# Altium PCB TSAL_PCB(2024).PcbDoc
Units mm, origin at the board's own origin, x right, y up, seen from the top; angles counter-clockwise.
Board outline 213 x 19 mm, 2 copper layers (Top Layer, Bottom Layer), stack 0.145 mm thick; 40 components, 25 nets, 107 pads, 27 vias.
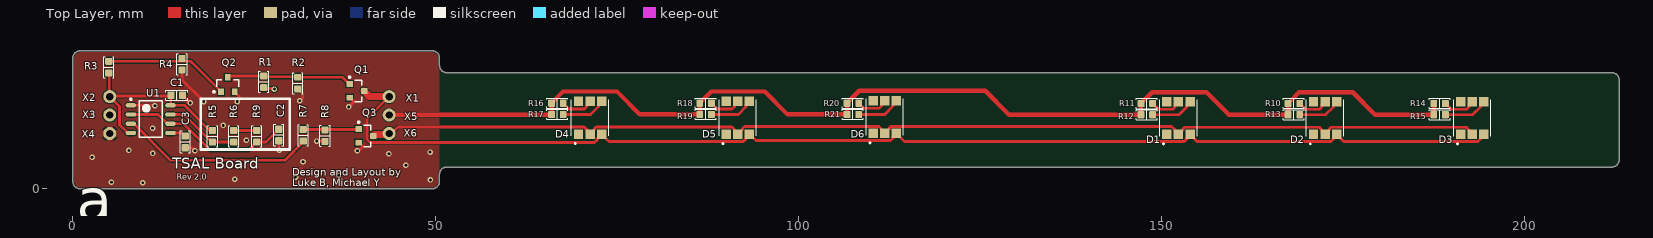
[diagram p0: Top Layer view]
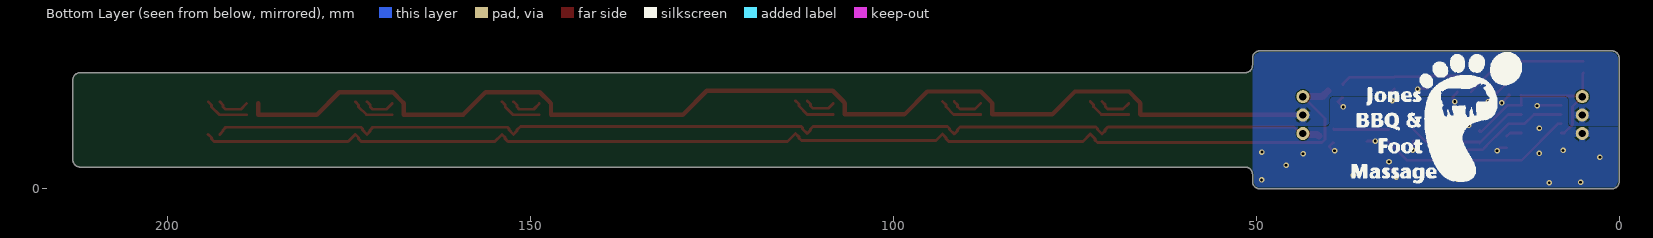
[diagram p1: Bottom Layer view, seen from below]
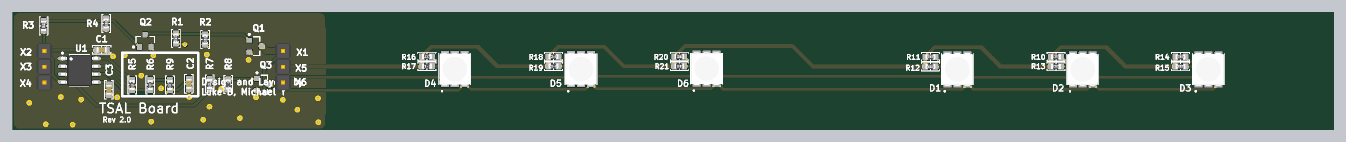
[diagram p2: 3D render of the assembled board from above, using the file's embedded part models]

## Layer stack, top to bottom
Board Layer Stack Top Coverlay: solder mask 0.0254, SM-001, Dk 4
Board Layer Stack Top Coverlay: solder mask 0.025, FC-001, Dk 4
Adhesive 1: prepreg 0.025, Core-009, Dk 4.5
Top Layer: signal copper 0.035
Dielectric 1: core 0.025, Core-009, Dk 4.5
Bottom Layer: signal copper 0.035
Adhesive 2: prepreg 0.025, Core-009, Dk 4.5
Board Layer Stack Bottom Solder: solder mask 0.025, FC-001, Dk 4
Board Layer Stack Bottom Solder: solder mask 0.0254, SM-001, Dk 4

## Board outline
0,1 0,18 cw(c1,18) 1,19 49.5,19 cw(c49.5,18) 50.5,18 50.5,17 ccw(c51.5,17) 51.5,16 212,16 cw(c212,15) 213,15 213,4 cw(c212,4) 212,3 51.5,3 ccw(c51.5,2) 50.5,2 50.5,1 cw(c49.5,1) 49.5,0 1,0 cw(c1,1)

## Design rules (kind name [scope] priority, off if disabled: settings)
BoardOutlineClearance [All] p1: gap=0.2 ignorepadtopadclearanceinfootprint=FALSE
Clearance [All] p1: gap=0.127 ignorepadtopadclearanceinfootprint=FALSE except(0.25: Arc-Hole Track-Hole SMDPad-Hole THPad-Hole Via-Hole Fill-Hole Poly-Hole Region-Hole Text-Hole)
ComponentClearance [All] p1: gap=0.127 collisioncheckmode=3 verticalgap=0.127 showdistances=TRUE
DiffPairsRouting [All] p1: maxlimit=0.254 minlimit=0.127 mostfreqgap=0.127 toplayer_minwidth=0.127 toplayer_maxwidth=25.4 toplayer_prefwidth=0.127 bottomlayer_minwidth=0.127 bottomlayer_maxwidth=25.4 bottomlayer_prefwidth=0.127 substack1={42DB8109-C194-40DB-AB75-C9E4D2E15DD2} toplayer_{42db8109-c194-40db-ab75-c9e4d2e15dd2}_minwidth=0.381 toplayer_{42db8109-c194-40db-ab75-c9e4d2e15dd2}_maxwidth=0.381 toplayer_{42db8109-c194-40db-ab75-c9e4d2e15dd2}_prefwidth=0.381 bottomlayer_{42db8109-c194-40db-ab75-c9e4d2e15dd2}_minwidth=0.381 bottomlayer_{42db8109-c194-40db-ab75-c9e4d2e15dd2}_maxwidth=0.381 bottomlayer_{42db8109-c194-40db-ab75-c9e4d2e15dd2}_prefwidth=0.381 maxuncoupledlength=12.7
Height [All] p1: minheight=0 maxheight=1816.048 prefheight=12.7
HoleSize [All] p1: absolutevalues=TRUE maxlimit=6.3 minlimit=0.3 maxpercent=80.000 minpercent=20.000
HoleToHoleClearance [All] p1: gap=0.25 allowstackedmicrovias=FALSE
MinimumAnnularRing [All] p1: minimumring=0.076
MinimumSolderMaskSliver [All] p1: minsoldermaskwidth=0
PlaneClearance [All] p1: clearance=0.127
PlaneConnect PlaneConnectPowerPads [InPadClass('PowerPads')] p1: planeconnectstyle=Direct reliefexpansion=0.508 reliefentries=4 reliefconductorwidth=0.254 reliefairgap=0.254
PlaneConnect [All] p2: pad.planeconnectstyle=Relief pad.reliefexpansion=0.3 pad.reliefentries=4 pad.reliefconductorwidth=0.127 pad.reliefairgap=0.127 via.planeconnectstyle=Direct via.reliefexpansion=0.3 via.reliefentries=4 via.reliefconductorwidth=0.127 via.reliefairgap=0.127
PolygonConnect PolygonConnectPowerPads [All vs (InPadClass('PowerPads'))] p1: connectstyle=Direct reliefconductorwidth=0.254 reliefentries=4 polygonreliefangle="90 Angle" airgapwidth=0.254
PolygonConnect [All] p2: thpad.connectstyle=Relief thpad.reliefconductorwidth=0.127 thpad.reliefentries=4 thpad.polygonreliefangle="90 Angle" thpad.airgapwidth=0.127 smdpad.connectstyle=Relief smdpad.reliefconductorwidth=0.127 smdpad.reliefentries=4 smdpad.polygonreliefangle="90 Angle" smdpad.airgapwidth=0.127 via.connectstyle=Direct via.reliefconductorwidth=0.127 via.reliefentries=4 via.polygonreliefangle="90 Angle" via.airgapwidth=0.127
RoutingVias [All] p1: holewidth=0.3 width=0.6 viastyle="Through Hole" minholewidth=0.3 minwidth=0.6 maxholewidth=0.6 maxwidth=6.6
SilkToSilkClearance [All] p1: silktosilkclearance=0
SilkToSolderMaskClearance [IsPad] p1: minsilkscreentomaskgap=0.127 clearancetoexposedcopper=TRUE
SolderMaskExpansion [All] p1: expansion=0.075 istentingtop=FALSE
Width [All] p1: maxlimit=25.4 minlimit=0.127 preferedwidth=0.127 substack1={42DB8109-C194-40DB-AB75-C9E4D2E15DD2} minimp=50.000000 maximp=50.000000 favimp=50.000000
20 further rules are at their usual default settings.

## Classes and differential pairs
component class U_RGB_LEDs: D1 D2 D3 D4 D5 D6 R10 R11 R12 R13 R14 R15 R16 R17 R18 R19 R20 R21
component class "TSAL Schematic(2024)": C1 C2 C3 Q1 Q2 Q3 R1 R2 R3 R4 R5 R6 R7 R8 R9 U1 X1 X2 X3 X4 X5 X6

## Components (designator, comment, footprint, x,y, rotation, side; value= is the part's Value field where it differs from the comment)
C1 "Capacitor" 0603_CAP 14.313,12.903 r180 top value=1u
C2 "Capacitor" 0603_CAP 28.372,7.415 r90 top value=1u
C3 "Capacitor" 0603_CAP 15.469,6.464 r90 top value=10n
D1 "BL-HBXJXGX32L" PLCC_5050 152.297,9.75 r90 top
D2 "BL-HBXJXGX32L" PLCC_5050 172.5,9.75 r90 top
D3 "BL-HBXJXGX32L" PLCC_5050 192.766,9.75 r90 top
D4 "BL-HBXJXGX32L" PLCC_5050 71.25,9.784 r90 top
D5 "BL-HBXJXGX32L" PLCC_5050 91.6,9.784 r90 top
D6 "BL-HBXJXGX32L" PLCC_5050 111.85,9.875 r90 top
Q1 "DMG2302UK-7" SOT23-3 39.116,13.487 r0 top
Q2 "DMG2302UK-7" SOT23-3 21.336,14.351 r90 top
Q3 "DMG2302UK-7" SOT23-3 40.361,7.29 r0 top
R1 "Resistor" 0603_RES 26.289,14.732 r90 top value=1k
R2 "Resistor" 0603_RES 30.988,14.567 r270 top value=100k
R3 "Resistor" 0603_RES 4.953,16.764 r90 top value=220
R4 "Resistor" 0603_RES 15.037,17.145 r270 top value=100k
R5 "Resistor" 0603_RES 19.228,7.239 r90 top value=10k
R6 "Resistor" 0603_RES 22.149,7.239 r270 top value=100k
R7 "Resistor" 0603_RES 31.725,7.391 r90 top value=220
R8 "Resistor" 0603_RES 34.725,7.327 r270 top value=100k
R9 "Resistor" 0603_RES 25.324,7.239 r90 top value=100k
R10 "Resistor" 0603_RES 168.2,11.766 r180 top value=500
R11 "Resistor" 0603_RES 147.947,11.75 r180 top value=500
R12 "Resistor" 0603_RES 147.947,10.2 r180 top value=445
R13 "Resistor" 0603_RES 168.2,10.216 r180 top value=445
R14 "Resistor" 0603_RES 188.266,11.766 r180 top value=500
R15 "Resistor" 0603_RES 188.266,10.216 r180 top value=445
R16 "Resistor" 0603_RES 66.75,11.8 r180 top value=500
R17 "Resistor" 0603_RES 66.75,10.25 r180 top value=445
R18 "Resistor" 0603_RES 87.15,11.8 r180 top value=500
R19 "Resistor" 0603_RES 87.15,10.25 r180 top value=445
R20 "Resistor" 0603_RES 107.45,11.8 r180 top value=500
R21 "Resistor" 0603_RES 107.45,10.25 r180 top value=445
U1 "555 Timer" SOIC-8 10.719,9.601 r0 top
X1 "GenericPinHeader(0.1in)" GenericPinHeader(.1in) 43.561,12.7 r0 top
X2 "GenericPinHeader(0.1in)" GenericPinHeader(.1in) 5.08,12.7 r0 top
X3 "GenericPinHeader(0.1in)" GenericPinHeader(.1in) 5.08,10.16 r0 top
X4 "GenericPinHeader(0.1in)" GenericPinHeader(.1in) 5.08,7.62 r0 top
X5 "GenericPinHeader(0.1in)" GenericPinHeader(.1in) 43.561,10.16 r0 top
X6 "GenericPinHeader(0.1in)" GenericPinHeader(.1in) 43.561,7.62 r0 top

## Footprints (in the part's own frame and the unit in brackets; to place one, negate y for a bottom-side part, rotate by r counter-clockwise, add the part's x,y. Pads: shape width x height; smd on the part's side, far side on the other; paste and mask are expansions set on the pad)
0603_CAP [mm]
  rrect25% 1x1 smd: 1(-0.8,0) 2(0.8,0)
  silkscreen extent -1.5,-0.7 1.5,0.7, body extent -0.8,-0.41 0.8,0.41, height 0.82
0603_RES [mm] "Chip Resistor, 2-Leads, Body 1.60x0.80mm, IPC Medium Density"
  rrect25% 0.95x1 smd: 1(-0.8,0) 2(0.8,0)
  silkscreen extent -1.45,-0.7 1.45,0.7, body extent -0.8,-0.4 0.8,0.4, height 0.45
GenericPinHeader(.1in) [mm] "Generic .1in (2.54mm) pin header"
  round 1.8 hole 1.016: 1(0,0)
  body extent -1.27,-1.27 1.27,1.27, height 9.5
PLCC_5050 [mm]
  rect 1.3x1.3 smd: 1(-2.25,1.6) 2(-2.25,0) 3(-2.25,-1.6) 4(2.25,-1.6) 5(2.25,0) 6(2.25,1.6)
  silkscreen extent -3.65,-2.57 2.5,2.57, body extent -2.7,-2.5 2.7,2.5, height 1.6
SOIC-8 [mm] "SOIC, 8-Leads, Body 4.90x3.90mm, Pitch 1.27mm, IPC Medium Density"
  oval 1.45x0.6 smd: 1(-2.725,1.905) 2(-2.725,0.635) 3(-2.725,-0.635) 4(-2.725,-1.905) 5(2.725,-1.905) 6(2.725,-0.635) 7(2.725,0.635) 8(2.725,1.905)
  silkscreen extent -2.85,-2.5 1.6,2.88, body extent -3,-2.5 3,2.5, height 1.75
SOT23-3 [mm] "SOT23, 3-Leads, Body 2.92x2.37mm, Pitch 0.95mm, IPC Medium Density, NUP2105L"
  rect 0.9x0.8 smd: 1(-1,0.95) 2(-1,-0.95) 3(1,0)
  silkscreen extent -1.12,-1.5 0.7,2.02, body extent -0.7,-1.52 0.7,1.52, height 1.11

## Part data
D1 D2 D3 D4 D5 D6: "PLCC6 5050, RGB LED"
Q1 Q2 Q3: library part CMP-12801-000001-1, "MOSFET N-CH 20V 2.8A SOT23", Continuous Drain Current=2.8A, Drain To Source Breakdown Voltage=20V, Drain To Source Resistance=61mΩ, Gate To Source Voltage=12V, Input Capacitace At Vds="130pF @ 10V", Manufacturer="Diodes Inc.", Max Forward Diode Voltage=1.2V, Max Junction Temp=+150°C, Package=SOT23, Power Dissipation=0.66W, Pulse Drain Current=12A, Temperature="-55°C to +150°C", Temperature Range Low=-55°C, Typ Forward Diode Voltage=0.7V, Automotive=Yes, Automotive Grade="Grade 0", Category=Trans, ComponentLink2Description=Datasheet, ComponentLink2URL=https://www.diodes.com/assets/Datasheets/DMG2302UK.pdf, Depletion Mode=False, Device Class L1="Discrete Semiconductors", Device Class L2=Transistors, Device Class L3=MOSFETs, Digikey Description="MOSFET N-CH 20V 2.8A SOT23", Drain To Source Voltage=20V, Footprint Url=https://www.diodes.com/assets/Package-Files/SOT23.pdf, Gate Charge At Vgs="2.8nC @ 10V", Height=1.1mm, Lead Free=Yes, Manufacturer Part Number=DMG2302UK-7, Number Of Channels=1, Number Of N Channels=1, Octopart=https://octopart.com/dmg2302uk-7-diodes+inc.-73850182, Reverse Recovery Charge=0.5nC, Reverse Recovery Time=5.3ns, RoHS=TRUE, Rthja Max=192°C/W, Standoff Height=0.013mm, Temperature Range High=+150°C, Threshold Vgs Max=1V, Threshold Vgs Min=0.3V, Turn Off Delay Time=4.2ns, Turn On Delay Time=0.6ns
U1: library part LM555, "Generic 555 timer IC", ComponentLink1Description=Digikey, ComponentLink1URL=https://www.digikey.com/en/products/detail/texas-instruments/NA555DR/1571933
X1 X2 X3 X4 X5 X6: "Generic .1in(2.54mm) pitch pin header"

## Via types
v1: diameter 0.762, hole 0.381, Top Layer to Bottom Layer, 27 vias

## Nets (pads, with @x,y where several pads share a name; then routed paths per layer and width w, separated by ;. In a path a pad name is that pad's centre, name@x,y a point inside that pad or via, vN(x,y) a via of type N, cw(c..) or ccw(c..) an arc to the next point about the centre after c; other vN are vias at no path point)
555-OUTPUT: R7.1 U1.3 | length 26.9
  Top Layer w0.381: U1.3 8.419,8.966 13.461,3.924 29.185,3.924 R7.1@31.725,6.464
+12: R1.1 R10.2 R11.2 R12.2 R13.2 R14.2 R15.2 R16.2 R17.2 R18.2 R19.2 R20.2 R21.2 X3.1 X5.1 | length 164.7
  Top Layer w0.381: R1.1 26.407,13.814 27.689,13.814 v1(27.762,13.741)
  Top Layer w0.6: X5.1 43.606,10.205 65.905,10.205 R17.2 R16.2 66.125,11.975 66.125,12 67.525,13.4 74.953,13.4 78.103,10.25 R19.2 R18.2 86.525,11.975 86.525,12 87.925,13.4 95.303,13.4 98.453,10.25 R21.2 R20.2 106.825,11.975 106.825,12 108.325,13.5 125.667,13.5 128.968,10.2 R12.2 R11.2 147.322,11.925 147.322,11.95 148.672,13.3 156.142,13.3 159.243,10.2 167.225,10.2 167.241,10.216 R13.2 R10.2 167.575,11.941 167.575,11.966 168.909,13.3 176.301,13.3 179.386,10.216 R15.2 R14.2
GND-PIN: C1.1 C2.1 C3.1 Q1.2 Q2.2 Q3.2 R2.2 R4.2 R8.2 U1.1 X4.1 | length 23.3
  Top Layer w0.381: U1.1 11.252,11.506 v1(11.303,11.455) ; R4.2 15.037,15.011 v1(18.034,12.014) ; C1.1@15.156,12.946 C1.1 16.154,11.862 v1(16.154,11.836) ; C3.1 16.383,5.664 v1(16.815,5.232) ; Q2.2 22.286,13.301 22.876,12.711 22.876,12.234 v1(22.657,12.014) ; C2.1 28.372,5.359 v1(28.435,5.296) ; v1(30.683,1.626) 30.683,2.032 31.394,2.743 ; R2.2 31.013,13.767 31.678,13.102 31.678,12.527 v1(31.267,12.116) ; v1(33.579,6.578) 34.673,6.578 R8.2 ; v1(37.998,11.278) 38.712,11.991 38.166,12.537 Q1.2 ; v1(39.192,5.232) 39.373,5.232 39.945,5.805 39.411,6.34 Q3.2
  other v1: 9.627,0.838 5.309,0.889 49.251,1.219 22.301,1.321 36.601,1.88 45.872,3.251 31.699,3.734 2.642,4.343 43.536,4.826 11.014,4.867 49.2,5.062 7.722,5.283 23.901,6.68 10.973,8.331 20.701,8.738
Green: D1.3 D2.3 D3.3 D4.3 D5.3 D6.3 Q1.3 X1.1 | length 170.1
  Top Layer w0.4: X1.1 40.534,9.673 40.534,6.804 40.945,6.393 71.871,6.393 72.227,6.749 72.227,6.911 D4.3 73.866,6.519 92.347,6.519 92.75,6.922 92.75,7.084 D5.3 94.086,6.648 112.635,6.648 113,7.013 113,7.175 D6.3 114.552,6.523 153.083,6.523 153.447,6.888 153.447,7.05 D1.3 154.874,6.523 173.285,6.523 173.65,6.888 173.65,7.05 D2.3 175.077,6.523 193.551,6.523 193.916,6.888 193.916,7.05 D3.3
  Top Layer w1: Q1.3 40.903,12.7 X1.1
NetC2_2: C2.2 R9.1 U1.2 U1.6 | length 23.6
  Top Layer w0.381: U1.2 11.749,10.236 13.019,8.966 U1.6 15.25,8.966 16.908,7.309 16.955,7.262 16.955,7.251 18.334,5.872 18.334,5.87 18.634,5.57 18.636,5.57 18.821,5.385 24.245,5.385 25.299,6.439 R9.1 26.596,6.439 C2.2
NetC3_2: C3.2 U1.5 | length 2.2
  Top Layer w0.381: U1.5 15.037,7.696 C3.2
NetD1_4: D1.4 R12.1 | length 6
  Top Layer w0.381: R12.1 152.354,10.2 153.438,11.284 153.438,11.54 D1.4
NetD1_5: D1.5 R11.1 | length 4.5
  Top Layer w0.381: R11.1 148.747,11.725 149.516,10.956 151.51,10.956 151.838,11.284 151.838,11.54 D1.5
NetD2_4: D2.4 R13.1 | length 6
  Top Layer w0.381: R13.1 172.573,10.216 173.64,11.284 173.64,11.54 D2.4
NetD2_5: D2.5 R10.1 | length 4.4
  Top Layer w0.381: R10.1 169,11.741 169.785,10.956 171.713,10.956 172.04,11.284 172.04,11.54 D2.5
NetD3_4: D3.4 R15.1 | length 6.2
  Top Layer w0.381: R15.1 192.838,10.216 193.906,11.284 193.906,11.54 D3.4
NetD3_5: D3.5 R14.1 | length 4.6
  Top Layer w0.381: R14.1 189.066,11.741 189.851,10.956 191.979,10.956 192.306,11.284 192.306,11.54 D3.5
NetD4_4: D4.4 R17.1 | length 6.2
  Top Layer w0.381: R17.1 71.323,10.25 72.39,11.318 72.39,11.575 D4.4
NetD4_5: D4.5 R16.1 | length 4.6
  Top Layer w0.381: R16.1 67.55,11.775 68.335,10.99 70.463,10.99 70.79,11.318 70.79,11.575 D4.5
NetD5_4: D5.4 R19.1 | length 6.1
  Top Layer w0.381: R19.1 91.673,10.25 92.74,11.318 92.74,11.575 D5.4
NetD5_5: D5.5 R18.1 | length 4.6
  Top Layer w0.381: R18.1 87.95,11.775 88.735,10.99 90.813,10.99 91.14,11.318 91.14,11.575 D5.5
NetD6_4: D6.4 R21.1 | length 6.1
  Top Layer w0.381: R21.1 111.832,10.25 112.99,11.409 112.99,11.666 D6.4
NetD6_5: D6.5 R20.1 | length 4.5
  Top Layer w0.381: R20.1 108.25,11.775 108.944,11.081 111.063,11.081 111.39,11.409 111.39,11.666 D6.5
NetQ2_1: Q2.1 R3.2 R4.1 | length 17.2
  Top Layer w0.381: R3.2 16.218,17.564 16.383,17.399 16.408,17.399 20.113,13.694 20.113,13.624 Q2.1
NetQ3_1: Q3.1 R7.2 R8.1 | length 7.7
  Top Layer w0.381: R7.2 31.763,8.153 34.698,8.153 R8.1 34.781,8.183 39.304,8.183 Q3.1
NetR5_1: R5.1 R6.2 U1.7 | length 10.4
  Top Layer w0.381: U1.7 15.304,10.236 R5.1@19.228,6.312 ; R5.1@19.203,6.439 R6.2
NetR6_1: R6.1 R9.2 | length 3.2
  Top Layer w0.381: R6.1 R9.2
NOT-TO-RED-FET: Q1.1 Q2.3 R1.2 R2.1 | length 17.5
  Top Layer w0.381: Q2.3 21.517,15.532 R1.2 26.372,15.449 30.906,15.449 R2.1 37.136,15.367 38.027,14.476 38.027,14.349 Q1.1
Red: D1.2 D2.2 D3.2 D4.2 D5.2 D6.2 Q3.3 X6.1 | length 157.5
  Top Layer w0.4: X6.1 43.9,7.62 44.791,8.511 70.435,8.511 70.8,8.147 70.8,7.984 D4.2 71.873,8.157 71.873,8.32 72.065,8.511 90.785,8.511 91.15,8.147 91.15,7.984 D5.2 92.223,8.157 92.223,8.32 92.506,8.602 111.035,8.602 111.4,8.238 111.4,8.075 D6.2 112.473,8.248 112.473,8.411 112.665,8.602 151.358,8.602 151.847,8.112 151.847,7.95 D1.2 152.92,8.123 152.92,8.285 153.112,8.477 171.685,8.477 172.05,8.112 172.05,7.95 D2.2 173.123,8.123 173.123,8.285 173.315,8.477 191.951,8.477 192.316,8.112 192.316,7.95 D3.2
  Top Layer w1: Q3.3 41.538,7.467 43.408,7.467 X6.1
TSLIVE-SIGNAL: C1.2 R3.1 R5.2 U1.4 U1.8 X2.1 | length 27
  Top Layer w0.381: R3.1 5.016,15.9 5.016,12.763 X2.1 ; U1.4 7.569,7.696 6.439,8.826 6.439,11.341 X2.1 ; C1.2 C1.2@13.478,12.869 ; R5.2@19.203,8.039 R5.2 ; R5.2@19.228,7.912 18.983,7.912 15.389,11.506 U1.8 13.478,11.541 C1.2@13.478,12.869 ; X2.1 5.182,12.802 13.411,12.802 C1.2@13.478,12.869
pads on no net: D1.1 D1.6 D2.1 D2.6 D3.1 D3.6 D4.1 D4.6 D5.1 D5.6 D6.1 D6.6

## Polygon pours and split planes (outlines as drawn)
+12 on Bottom Layer "+12_L02_P005" (solid, pour order 5): 6.466,8.661 0,8.661 0,19.05 50.5,19.05 50.5,8.661 40.509,8.661 cw(c40.509,9.216) 39.954,9.216 39.954,12.199 ccw(c39.352,12.199) 39.352,12.802 7.55,12.802 ccw(c7.55,12.19) 6.938,12.186 6.958,9.156 cw(c6.466,9.153)
GND-PIN on Bottom Layer "GND-PIN_L02_P006" (solid, pour order 6): 0,13.957 50.5,13.957 50.5,-0.051 0.025,-0.051 0.025,-0.025
GND-PIN on Top Layer "GND-PIN_L01_P000" (solid, pour order 0): 0,19.05 50.5,19.05 50.5,0 0,0
no net on Layer0 "NONET_L-01_P-001" (split plane): 0,1 0,18 cw(c1,18) 1,19 49.5,19 cw(c49.5,18) 50.5,18 50.5,17 ccw(c51.5,17) 51.5,16 212,16 cw(c212,15) 213,15 213,4 cw(c212,4) 212,3 51.5,3 ccw(c51.5,2) 50.5,2 50.5,1 cw(c49.5,1) 49.5,0 1,0 cw(c1,1)
no net on Layer0 "NONET_L-01_P-001" (split plane): 0,1 0,18 cw(c1,18) 1,19 49.5,19 cw(c49.5,18) 50.5,18 50.5,17 ccw(c51.5,17) 51.5,16 212,16 cw(c212,15) 213,15 213,4 cw(c212,4) 212,3 51.5,3 ccw(c51.5,2) 50.5,2 50.5,1 cw(c49.5,1) 49.5,0 1,0 cw(c1,1)
no net on Layer0 "Default Coverlay 2 Top" (split plane): 0,1 0,18.098 0.038,18.292 0.114,18.474 0.223,18.637 0.363,18.777 0.526,18.886 0.708,18.962 0.902,19 1,19 49.5,19 49.598,19 49.792,18.962 49.974,18.886 50.137,18.777 50.277,18.637 50.386,18.474 50.462,18.292 50.5,18.098 50.5,18 50.5,17 50.505,16.902 50.543,16.71 50.618,16.529 50.727,16.366 50.866,16.227 51.029,16.118 51.21,16.043 51.402,16.005 51.5,16 212,16 212.099,16 212.292,15.962 212.474,15.886 212.637,15.777 212.777,15.637 212.886,15.474 212.962,15.292 213,15.098 213,15 213,4 213,3.902 212.962,3.708 212.886,3.526 212.777,3.363 212.637,3.223 212.474,3.114 212.292,3.038 212.098,3 212,3 51.5,3 51.402,2.995 51.21,2.957 51.029,2.882 50.866,2.773 50.727,2.634 50.618,2.471 50.543,2.29 50.505,2.098 50.5,2 50.5,1 50.5,0.901 50.462,0.708 50.386,0.526 50.277,0.362 50.137,0.223 49.974,0.114 49.792,0.038 49.598,0 49.5,0 1,0 0.902,0 0.708,0.038 0.526,0.114 0.363,0.223 0.223,0.362 0.114,0.526 0.038,0.708 0,0.901
no net on Layer0 "Default Coverlay 2 Bottom" (split plane): 0,1 0,18.098 0.038,18.292 0.114,18.474 0.223,18.637 0.363,18.777 0.526,18.886 0.708,18.962 0.902,19 1,19 49.5,19 49.598,19 49.792,18.962 49.974,18.886 50.137,18.777 50.277,18.637 50.386,18.474 50.462,18.292 50.5,18.098 50.5,18 50.5,17 50.505,16.902 50.543,16.71 50.618,16.529 50.727,16.366 50.866,16.227 51.029,16.118 51.21,16.043 51.402,16.005 51.5,16 212,16 212.099,16 212.292,15.962 212.474,15.886 212.637,15.777 212.777,15.637 212.886,15.474 212.962,15.292 213,15.098 213,15 213,4 213,3.902 212.962,3.708 212.886,3.526 212.777,3.363 212.637,3.223 212.474,3.114 212.292,3.038 212.098,3 212,3 51.5,3 51.402,2.995 51.21,2.957 51.029,2.882 50.866,2.773 50.727,2.634 50.618,2.471 50.543,2.29 50.505,2.098 50.5,2 50.5,1 50.5,0.901 50.462,0.708 50.386,0.526 50.277,0.362 50.137,0.223 49.974,0.114 49.792,0.038 49.598,0 49.5,0 1,0 0.902,0 0.708,0.038 0.526,0.114 0.363,0.223 0.223,0.362 0.114,0.526 0.038,0.708 0,0.901

## Silkscreen, mask and mechanical layers (free items; w line width, h text height)
Board Layer Stack Top Overlay:
  lines w0.381: 17.622,5.415 17.622,12.415 29.872,12.415 29.872,5.415 17.622,5.415
  text "TSAL Board" at 13.716,2.743 h1.52
  text "Rev 2.0" at 14.3,1.245 h0.8
  text "Design and Layout by / Luke B, Michael Y" at 30.25,0.33 h1
  text "a" at 0.508,-6.35 h10
Board Layer Stack Bottom Overlay:
  drawing of 26 lines, arcs and shapes, not listed
Mechanical 13:
  the board outline again, w0.5